# EAGLE board SHEALD 2022 (EAGLE 9.6.2)
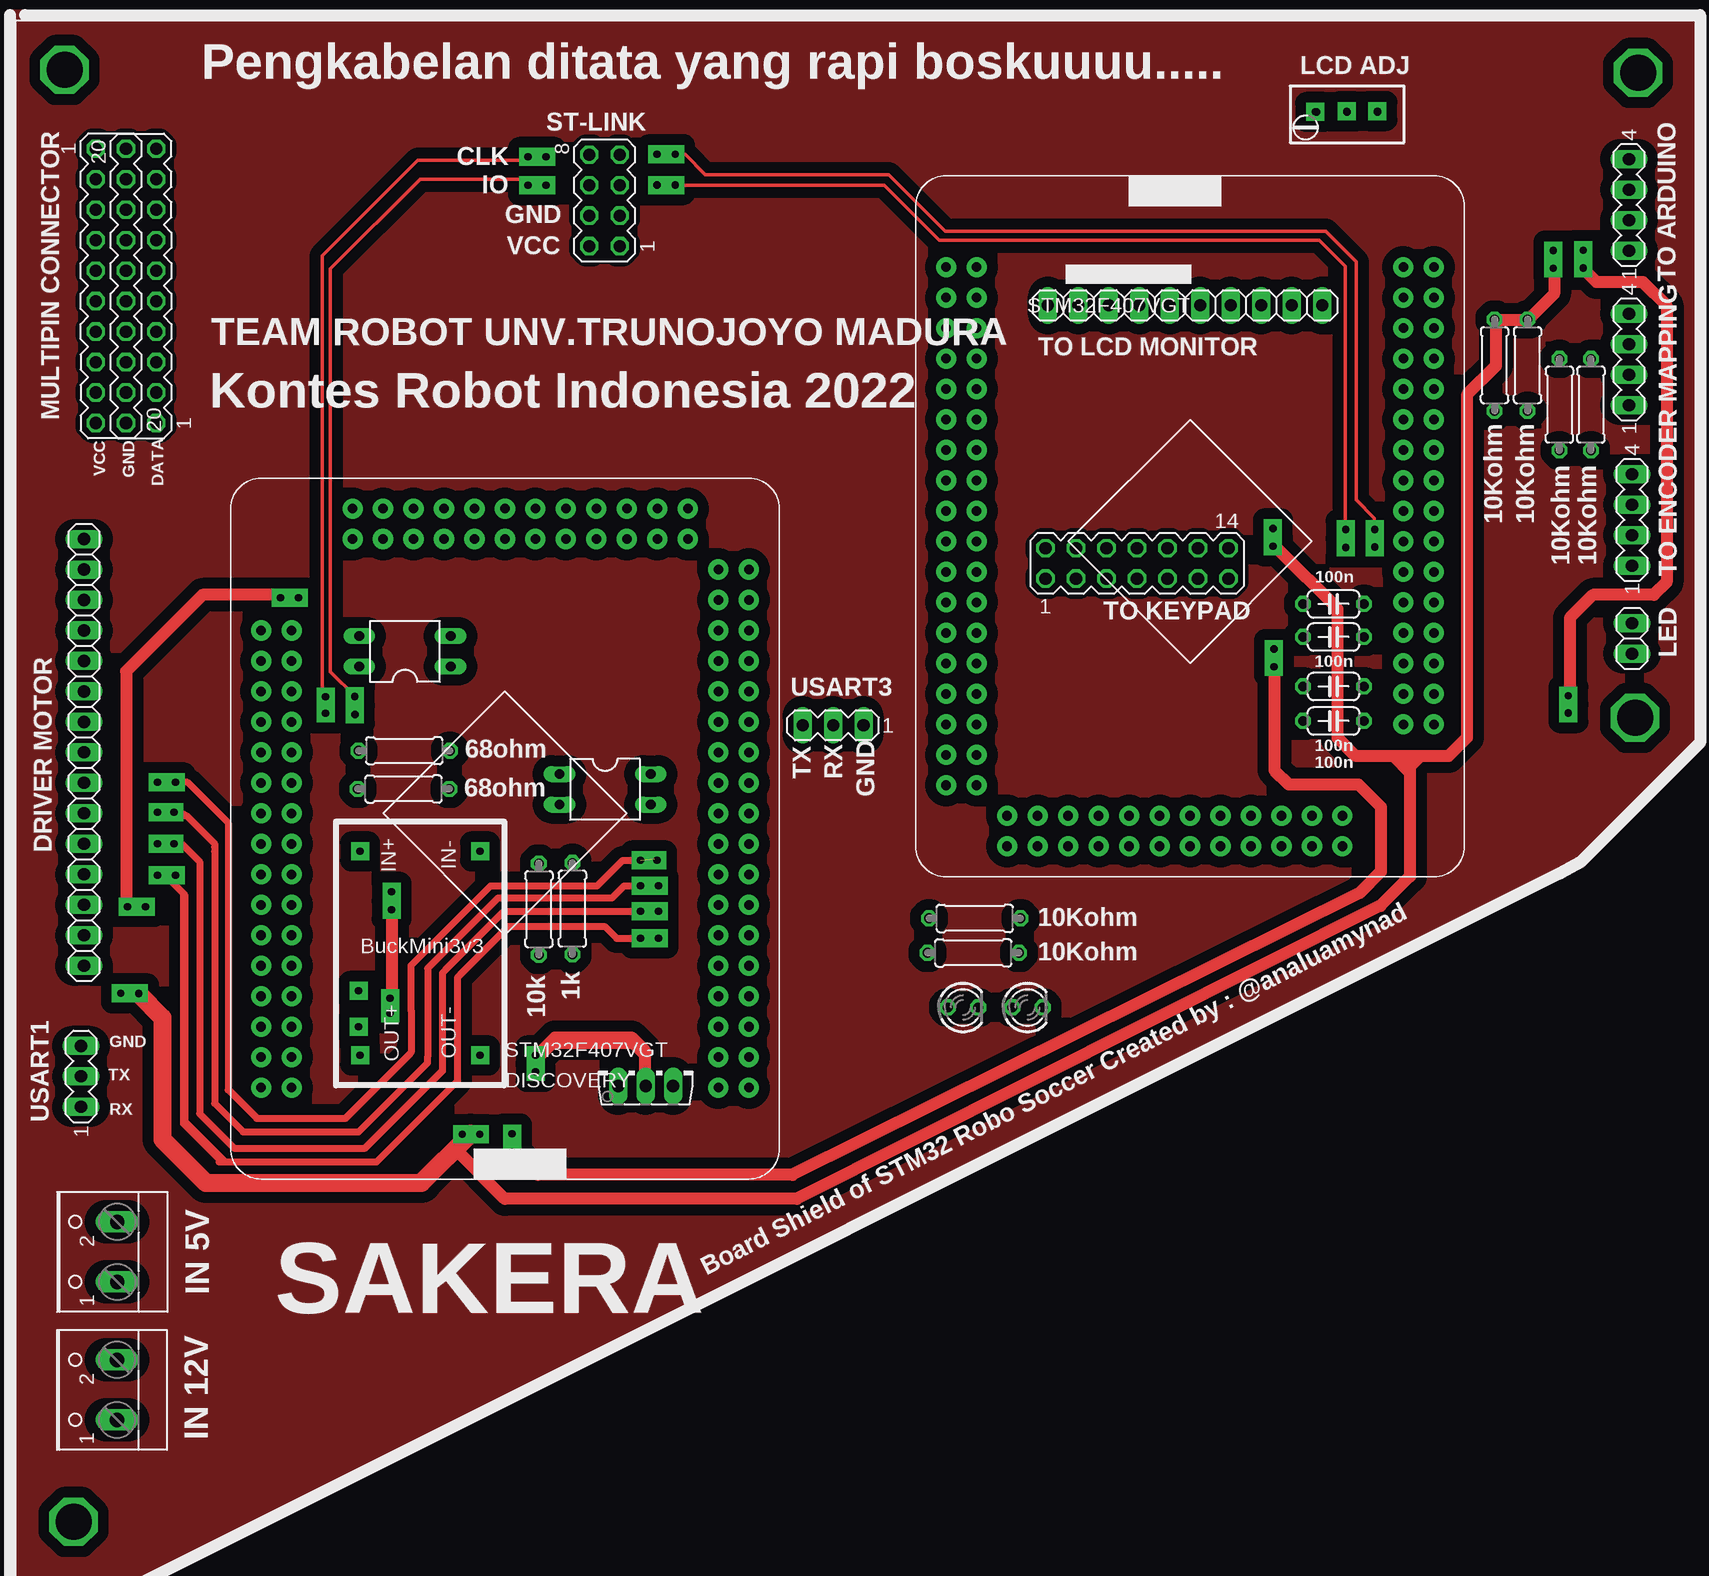
[diagram p0: board, top side]
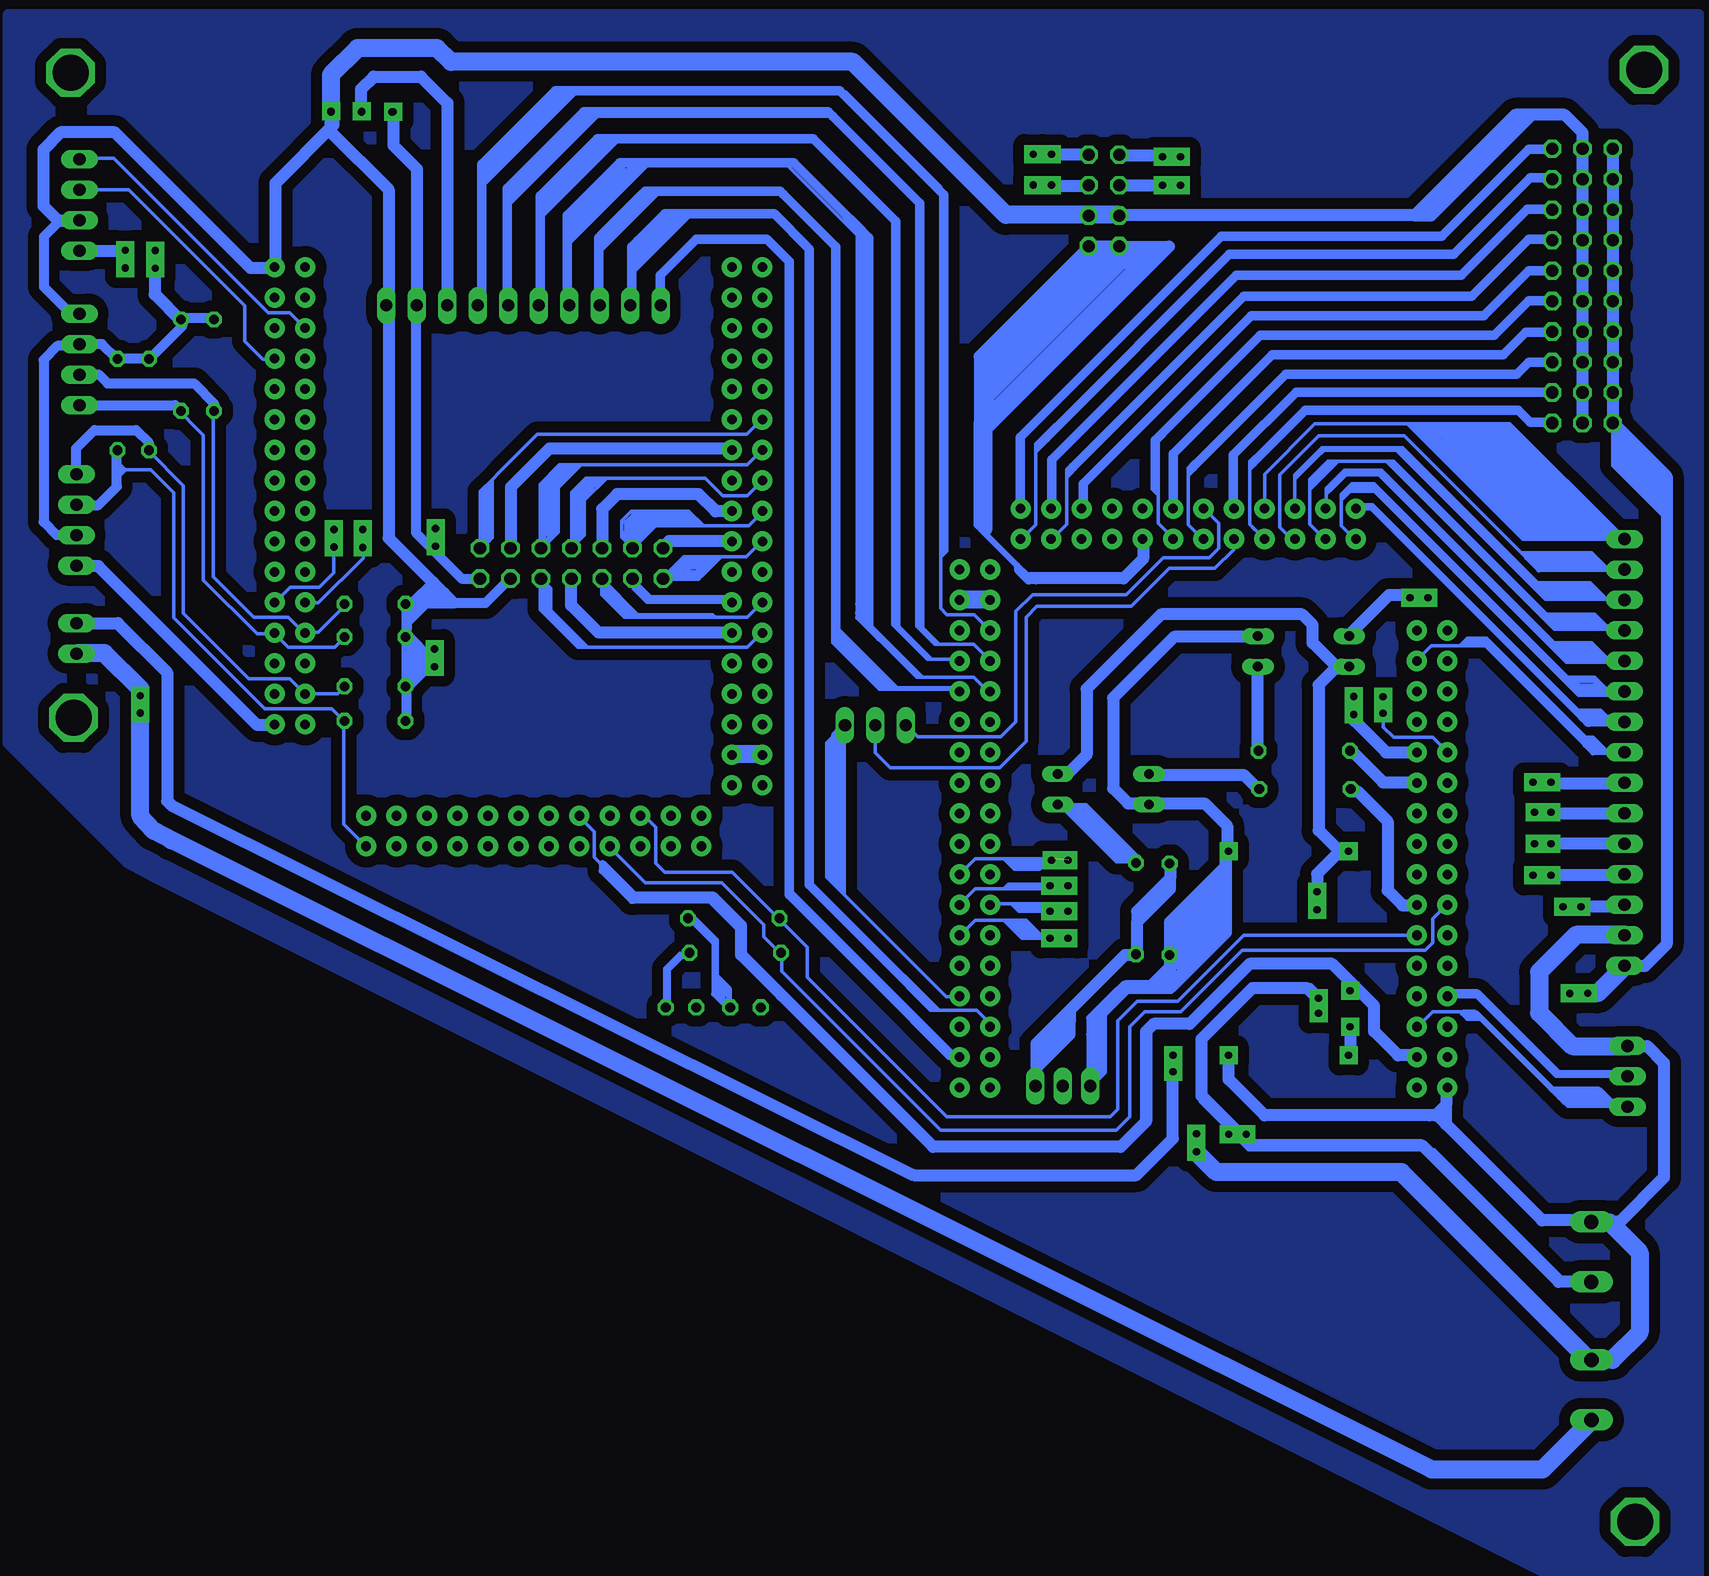
[diagram p1: board, bottom side, seen from below]

No outline drawn. Coordinates in mm, seen from the top.
Copper layers (1*16): Top 0.035mm / dielectric 1.5mm / Bottom 0.035mm
Design rules "default *": minimum track width 6mil, minimum drill 0.35mm, track to track 36mil, track to pad 36mil, pad to pad 6mil, via to via 6mil, smd to smd 6mil, copper to edge 60mil, drill to drill 60mil, minimum pad ring 10mil, minimum via ring 8mil, stop-mask expansion 0mil, vias tented up to drill 0mil, thermal gap 0mil

## Footprints (pad centres in the part's own frame; a part is rotated, then mirrored left to right if it is on the bottom)
STM32F407VGT = drill 0.8 pad 1.676: 1 22.86,12.7; 2 25.4,12.7; 3 22.86,15.24; 3.3V(0) -12.7,-25.4; 3.3V(1) 22.86,-20.32; 3.3V(3) 10.16,17.78; 4 25.4,15.24; GND -15.24,-27.94; GND(0) -15.24,-25.4; GND(1) 25.4,-20.32; GND(2) -15.24,10.16; GND(3) 12.7,17.78; PA0 25.4,-15.24; PA1 22.86,-12.7; PA2 25.4,-12.7; PA3 25.4,-10.16; PA4 22.86,-7.62; PA5 25.4,-7.62; PA6 22.86,-5.08; PA7 25.4,-5.08; PA8 -15.24,7.62; PA9 -12.7,5.08; PA10 -15.24,5.08; PA11 -12.7,2.54; PA12 -15.24,2.54; PA13 -12.7,0; PA14 -15.24,0; PA15 -12.7,-2.54; PB0 22.86,0; PB1 25.4,0; PB2 25.4,10.16; PB3 -12.7,-17.78; PB4 -15.24,-17.78; PB5 -12.7,-20.32; PB6 -15.24,-20.32; PB7 -12.7,-22.86; PB8 22.86,2.54; PB9 25.4,2.54; PB10 15.24,17.78; PB11 12.7,20.32; PB12 10.16,20.32; PB13 7.62,17.78; PB14 7.62,20.32; PB15 5.08,17.78; PC0 22.86,-17.78; PC1 25.4,-17.78; PC2 22.86,-15.24; PC3 22.86,-10.16; PC4 22.86,-2.54; PC5 25.4,-2.54; PC6 -5.08,20.32; PC7 -7.62,17.78; PC8 -7.62,20.32; PC9 -12.7,7.62; PC10 -15.24,-2.54; PC11 -12.7,-5.08; PC12 -15.24,-5.08; PC13 25.4,-22.86; PD0 -12.7,-7.62; PD1 -15.24,-7.62; PD2 -12.7,-10.16; PD3 -15.24,-10.16; PD4 -12.7,-12.7; PD5 -15.24,-12.7; PD6 -12.7,-15.24; PD7 -15.24,-15.24; PD8 5.08,20.32; PD9 2.54,17.78; PD10 2.54,20.32; PD11 0,17.78; PD12 0,20.32; PD13 -2.54,17.78; PD14 -2.54,20.32; PD15 -5.08,17.78; PE0 -15.24,-22.86; PE1 22.86,5.08; PE2 22.86,-27.94; PE3 25.4,-27.94; PE4 22.86,-25.4; PE5 25.4,-25.4; PE6 22.86,-22.86; PE7 25.4,5.08; PE8 22.86,7.62; PE9 25.4,7.62; PE10 22.86,10.16; PE11 20.32,20.32; PE12 20.32,17.78; PE13 17.78,20.32; PE14 17.78,17.78; PE15 15.24,20.32; VCC -12.7,-27.94; VCC(2) -12.7,10.16
1X15 = drill 1.016 long: 1 -17.78,0; 2 -15.24,0; 3 -12.7,0; 4 -10.16,0; 5 -7.62,0; 6 -5.08,0; 7 -2.54,0; 8 0,0; 9 2.54,0; 10 5.08,0; 11 7.62,0; 12 10.16,0; 13 12.7,0; 14 15.24,0; 15 17.78,0
DIL04 = drill 0.813 long: 1 -1.27,-3.81; 2 1.27,-3.81; 3 1.27,3.81; 4 -1.27,3.81
0207/7 = drill 0.813 octagon: 1 -3.81,0; 2 3.81,0
MA07-2 = drill 1.016 octagon: 1 -7.62,-1.27; 2 -7.62,1.27; 3 -5.08,-1.27; 4 -5.08,1.27; 5 -2.54,-1.27; 6 -2.54,1.27; 7 0,-1.27; 8 0,1.27; 9 2.54,-1.27; 10 2.54,1.27; 11 5.08,-1.27; 12 5.08,1.27; 13 7.62,-1.27; 14 7.62,1.27
1X10 = drill 1.016 long: 1 -11.43,0; 2 -8.89,0; 3 -6.35,0; 4 -3.81,0; 5 -1.27,0; 6 1.27,0; 7 3.81,0; 8 6.35,0; 9 8.89,0; 10 11.43,0
MA10-2 = drill 1.016 octagon: 1 -11.43,-1.27; 2 -11.43,1.27; 3 -8.89,-1.27; 4 -8.89,1.27; 5 -6.35,-1.27; 6 -6.35,1.27; 7 -3.81,-1.27; 8 -3.81,1.27; 9 -1.27,-1.27; 10 -1.27,1.27; 11 1.27,-1.27; 12 1.27,1.27; 13 3.81,-1.27; 14 3.81,1.27; 15 6.35,-1.27; 16 6.35,1.27; 17 8.89,-1.27; 18 8.89,1.27; 19 11.43,-1.27; 20 11.43,1.27
MA04-1 = drill 1.016 long: 1 -3.81,0; 2 -1.27,0; 3 1.27,0; 4 3.81,0
MA03-1 = drill 1.016 long: 1 -2.54,0; 2 0,0; 3 2.54,0
W237-102 = drill 1.194 long: 1 -2.5,-1.27; 2 2.5,-1.27
TO126AV = drill 1.016 long: B 2.286,-1.27; C 0,-1.27; E -2.286,-1.27
C050-024X044 = drill 0.813 octagon: 1 -2.54,0; 2 2.54,0
LED3MM = drill 0.813 octagon: A -1.27,0; K 1.27,0
BUCK3V3 = drill 0.6 pad 1.5 square: IN+ -5,10; IN- 5,10; OUT+ -5,-7; OUT- 5,-7
MA04-2 = drill 1.016 octagon: 1 -3.81,-1.27; 2 -3.81,1.27; 3 -1.27,-1.27; 4 -1.27,1.27; 5 1.27,-1.27; 6 1.27,1.27; 7 3.81,-1.27; 8 3.81,1.27
1X02 = drill 1.016 long: 1 -1.27,0; 2 1.27,0
RTRIMT93YA = drill 0.61: 1 0,-2.54; 2 0,0; 3 0,2.54

## Placement (x,y rotation side)
E$1  [STM32F407VGT]  45.75,99 0 top
E$2  [STM32F407VGT]  113,111.5 180 top
E$3  [1X15]  15.75,99 90 top
E$4  [DIL04]  59.17,95.92 270 top
E$5  [0207/7]  42.38,95.95 0 top
E$6  [MA07-2]  103.5,114.75 0 top
E$7  [1X10]  107.5,136.25 0 top
E$8  [MA10-2]  18,137.88 270 top
E$9  [MA10-2]  20.5,137.88 90 top
E$10  [MA04-1]  144.75,118.38 90 top
E$11  [MA04-1]  144.5,131.75 90 top
E$12  [MA03-1]  15.5,72 90 top
E$13  [W237-102]  17.23,45.88 90 top
E$14  [TO126AV]  62.55,72.47 0 top
E$15  [0207/7]  138.71,127.98 90 top
E$16  [0207/7]  141.33,127.98 90 top
E$17  [0207/7]  136.04,131.27 270 top
E$18  [0207/7]  133.29,131.27 270 top
E$19  [C050-024X044]  119.88,111.38 0 top
E$20  [C050-024X044]  119.88,108.62 0 top
E$21  [C050-024X044]  119.88,104.5 0 top
E$22  [C050-024X044]  119.88,101.62 0 top
E$23  [LED3MM]  94.38,77.75 0 top
E$24  [LED3MM]  89,77.75 0 top
E$25  [0207/7]  89.98,85.17 0 top
E$26  [0207/7]  89.86,82.3 0 top
E$27  [W237-102]  17.25,57.38 90 top
E$28  [MA04-1]  144.5,144.62 90 top
E$29  [BUCK3V3]  43.75,80.75 0 top
E$30  [MA04-2]  59.12,145 90 top
E$31  [1X02]  144.75,108.5 90 top
E$32  [RTRIMT93YA]  121,152.38 90 top
E$33  [MA03-1]  78.17,101.26 180 top
E$42  [DIL04]  42.49,107.42 90 top
E$43  [0207/7]  56.45,85.98 90 top
E$44  [0207/7]  42.44,99.14 180 top
E$45  [0207/7]  53.66,85.94 270 top

## Library data of the parts
E$1 E$2 E$29 = KRSBI COMPONENT
E$3 = adafruit
E$4 E$42 = ic-package
E$5 E$15-E$18 E$25 E$26 E$43-E$45 = resistor
E$6 E$8-E$12 E$28 E$30 E$33 = con-lstb
E$7 E$31 = Connector
E$13 E$27 = con-wago-500
E$14 = transistor-power
E$19-E$22 E$32 = rcl
E$23 E$24 = led

## Nets
S$15: E$3.8
S$227: E$29.OUT-

## Tracks (layer width: path | path; a pad name or v marks a point on that pad's centre or on a via)
BUTTOM
  pour Bottom: 10.31,160.44 150.43,160.44 150.43,146.99 150.43,100.8 150.43,99.8 149.31,98.69 140.53,89.9 138.34,88.7 20.66,29.85 20.19,29.61 9.6,29.61 9.6,31.21 9.6,160.44 9.64,160.44 10.62,160.43
S$1
  Bottom 0.3: 71,86.25 71.25,86.25
S$2
  Bottom 0.3: 50.79,119.35 49.55,118.11 49.55,116.01 50.34,115.22 54.19,115.22 57.26,112.15 65.06,112.15 66.46,110.75 66.46,101.56 67.74,100.29 74.64,100.29 75.54,101.19
S$3
  Bottom 0.3: 48.33,116.8 48.33,115.89 49.89,114.33 53.69,114.33 56.84,111.17 64.71,111.17 65.61,110.28 65.61,99.91 67.83,97.7 76.94,97.7 78.2,98.96 78.2,101.12
S$4
  Bottom 0.3: 71.19,78.64 72.28,78.64 80.76,87.12 80.76,101.28
S$5
  Bottom 0.3: 33,76.12 31.75,77.38 28.38,77.38 28.25,77.25 20.5,69.5 15.62,69.5
  Bottom 0.5: 15.62,69.5 15.75,69.62 16.62,69.62 17.88,70.88 21.75,70.88 | 21.75,70.88 21.88,71 | 21.75,70.88 20.75,69.88 17.38,69.88 | 17.38,69.88 17.12,69.62 | 17.38,69.88 18,70.5 20.75,70.5 | 20.88,70.62 20.75,70.5 | 20.75,70.5 20.75,70.38 20.62,70.25 | 20.62,70.25 18.12,70.25 | 20.62,70.25 21.12,70.25 27.75,76.88 | 27.75,76.88 28.12,77.25 | 28.12,77.25 28.25,77.25 | 28.12,77.25 28.18,77.3 29.25,77.3 28.82,76.88 27.75,76.88
S$6
  Bottom 0.3: 80.83,101.17 82.21,99.79 82.21,88.59 79.81,86.19
S$7  (via drill 0.6 pad 1.5)
  Top 0.3: 24.25,93.88 26.62,91.5 26.62,91.12 | 26.62,90.75 26.62,69.88 29.25,67.25 38.62,67.25 44.38,73 44.38,73.62 44.38,81.12 50.12,86.88 58.25,86.88
  Top 0.6: 24.25,93.75 26.62,91.38 26.62,91.12 26.62,90.75 26.62,69.75 29,67.38 38.62,67.38 44.38,73.12 44.38,73.62 44.38,81 50.25,86.88 59.75,86.88 60.75,87.88 v62.12,87.88
S$8
  Bottom 0.3: 40.62,119.38 40.62,120.5 | 40.62,120.5 40.62,121 39.62,122 39.5,122.12 | 39.5,122.12 39,122.12 | 39,122.12 36.25,122.12 22.25,108.12 | 16.88,106.5 20.62,106.5 22.25,108.12 | 16.88,106.5 15.5,106.5 | 16.88,106.5 18.5,108.12 21.62,108.12 | 21.62,108.12 22.25,108.12 | 40.62,120.5 39,122.12 | 21.62,108.12 36,122.5 39.12,122.5 39.5,122.12
S$9
  Bottom 0.3: 43.25,116.5 44.5,117.75 44.5,122.12 41.25,125.38 34.12,125.38 23,114.25 17.12,114.25 | 17.12,114.25 16,114.25 15.75,114.25 | 17.12,114.25 18.5,115.62 24.25,115.62
  Bottom 0.5: 16,114.25 22.88,114.25 23.88,115.25 23.75,115.38 18.62,115.38 17.88,114.62 | 17.75,114.5 17.88,114.62 | 17.88,114.62 22.88,114.62 23.25,115 18.62,115 18.75,115.12 23.62,115.12
S$10
  Bottom 0.3: 40.75,116.75 42,118 42,120.88 | 42,120.88 42,121.75 40.5,123.25 39.62,123.25 | 39.62,123.25 36.12,123.25 35.62,123.25 | 35.62,123.25 22.88,110.5 | 22.88,110.5 21.62,109.25 15.75,109.25 | 16.88,109.12 18.25,110.5 22.25,110.5 | 22.25,110.5 22.88,110.5 | 42,120.88 39.62,123.25 | 22.25,110.5 35,123.25 35.62,123.25
S$11
  Bottom 0.3: 45.75,119.25 45.75,122.19 41.56,126.38 33.88,126.38 24.25,116.75 15.75,116.75
S$12
  Bottom 0.5: 45.75,119.5 45.75,119
S$13
  Bottom 0.3: 43.25,119.25 43.25,121.75 | 43.25,121.75 43.25,122.12 41,124.38 40.62,124.38 | 40.62,124.38 35.75,124.38 35,124.38 | 35,124.38 23.75,113.12 | 23.75,113.12 22.38,111.75 15.75,111.75 | 17.12,111.62 18.62,113.12 23,113.12 | 23,113.12 23.75,113.12 | 43.25,121.75 40.62,124.38 | 23,113.12 34.25,124.38 35,124.38
  Bottom 0.5: 43.25,119.25 43.25,119.5
S$14
  Bottom 0.3: 33.12,73.62 35,73.62 36.75,75.38 36.75,77.88 40.38,81.5 46.5,81.5 51.38,76.62 55.12,76.62 56,75.75 56,68.25 57.75,66.5 73.75,66.5 86,78.75 89.12,81.88 89.12,83 89.12,84.75 91.5,87.12 92.25,87.12 98.5,87.12 101.62,90.25 101.62,92.38 102.88,93.62 102.88,93.75
  Bottom 0.5: 89.12,83 89.12,84.62 91.62,87.12 92.25,87.12 98.25,87.12 100.88,89.75 101,89.75 101,89.12 98.5,86.62
  Bottom 1: 32.88,73.62 33,73.75 34.62,73.75 36.62,75.75 36.62,77.88 40.12,81.38 47,81.38 52,76.38 55,76.38 55.62,75.75 55.62,68.25 57.75,66.12 73.38,66.12 86,78.75 89.38,82.12 89.38,84.38 91.88,86.88 98.38,86.88 98.5,87
S$15
  Bottom 0.3: 33.25,106.5 31.88,107.88 29.5,107.88 | 29.5,107.88 27.38,107.88 19.75,100.25 | 19.75,100.25 18.5,99 17.12,99 | 17.12,99 E$3.8 | 17.12,99 18.38,100.25 19,100.25 | 19,100.25 19.75,100.25 | 19,100.25 27.25,108.5 28.88,108.5 29.5,107.88
  Bottom 0.5: E$3.8 18.38,99 19,99.62
S$16
  Bottom 0.3: 71.12,86.38 69.88,87.62 68.12,87.62 67.5,87.62 | 67.5,87.62 64.25,87.62 | 64.25,87.62 64,87.62 63.75,87.88 | 64.25,87.62 63.88,88 67.12,88 67.5,87.62
S$17  (via drill 0.6 pad 1.5)  (1 unrouted)
  Top 0.3: 24.5,96.5 27.88,93.12 27.88,71 30.5,68.38 37.62,68.38 43,73.75 43,77.5 43,81.38 49.25,87.62 49.38,87.62
  Top 0.6: v62.12,90 60.62,90 58.5,87.88 49.62,87.88 49.38,87.62 43,81.25 43,77.5 43,74 37.5,68.5 30.12,68.5 27.75,70.88 27.75,93.12 24.38,96.5 23.38,96.5
  Bottom 0.3: 71.25,88.75 69.88,90.12 67.5,90.12 | 63.25,90.12 63.62,90.12 | 63.62,90.12 67.5,90.12 | 63.62,90.12 64.5,89.25 66.62,89.25 67.5,90.12
S$18
  Top 0.3: 25.38,68.9 28.4,65.88 39.25,65.88 45.75,72.38 45.75,81 50.5,85.75 58.12,85.75
  Top 0.6: 23.88,91.38 25.38,89.88 25.38,68.9 28.27,66 39.12,66 45.62,72.5 45.62,80.62 50.75,85.75 62.38,85.75
S$19
  Top 0.3: 22.5,88.88 23.88,87.5 23.88,68 27,64.88 27.12,64.75 40.12,64.75 47,71.62 47,80.62 51,84.62 57.88,84.62
  Top 0.6: 22.38,88.88 24.12,87.12 24.12,68.26 27.51,64.88 | 27,64.88 27.51,64.88 | 27.51,64.88 40.12,64.88 46.88,71.62 46.88,80.25 51.12,84.5 59.12,84.5 60.12,83.5 62.38,83.5
S$20
  Bottom 0.3: 68.61,109.15 69.92,110.46 72.21,110.46 72.75,111 72.75,115.25 | 72.75,115.25 72.75,146.12 80.62,154 105.12,154 111.25,147.88 111.25,136.25 111,136.25 | 72.25,118 72.25,115.75 72.5,115.5 | 72.75,115.25 72.5,115.5 | 72.5,115.5 72.5,117.88
  Bottom 0.5: 101.38,154.12 103.12,154.12 110.62,146.62 | 111.12,146.12 110.62,146.62 | 110.62,146.62 110.62,147.62 104.62,153.62 104.62,153.75 104,153.75 103.88,153.62 104,153.5 104.38,153.5 107,150.88 107,150.62 110.38,147.25 110.5,147.25
  Bottom 0.8: 111,135.88 111,148 104.88,154.12 101.38,154.12 81.15,154.12 72.5,145.47 72.5,117.88 72.5,117.75
S$21
  Bottom 0.3: 87.6,116.64 88.92,115.31 90.59,115.31 91.01,115.31 | 91.01,115.31 92.66,113.66 92.67,113.66 92.9,113.44 95.72,113.44 | 95.72,113.44 95.83,113.44 | 95.72,113.44 95.72,113.72 94.14,115.31 91.01,115.31
S$22
  Bottom 0.3: 76.5,111.25 76.5,109.38 | 76.75,111.5 76.75,109.62 76.5,109.38 | 76.5,109.38 73.88,106.75 73.5,106.75 | 71.25,106.75 73.5,106.75 | 73.5,106.75 76.25,109.5 76.25,111.12
  Bottom 0.5: 98.5,150.12 99.62,150.12 106.12,143.62 | 106.12,143.62 106.12,142.75 | 106.12,143.62 106.12,144.62 101,149.75 100.5,149.75 105.62,144.62 105.62,144.38
  Bottom 0.8: 106.12,136.25 106.12,142.75 106.12,145.38 101.38,150.12 98.5,150.12 83.36,150.12 76.5,143.26 76.5,111.25
S$23
  Bottom 0.8: 21.88,149.25 23.75,149.25 31,142 49.38,142 66.12,125.25 66.12,119.25
S$24
  Bottom 1: 80.38,143.38 79.38,142.38 79.38,110.62 78.88,110.12
S$25
  Bottom 0.3: 125.66,111.45 124.59,111.45 120.86,115.17 120.86,116.14
S$26
  Bottom 1: 90.19,116.6 95.36,116.6 95.88,116.09
S$27
  Bottom 0.8: 85.38,137.75 85.38,87.12 74.25,76
S$28
  Bottom 0.3: 128.25,111.45 126.95,112.75 124.51,112.75 123.31,113.95 123.31,116.06
S$29
  Bottom 0.3: 100.91,113.41 97.99,110.49 91.71,110.49 91.47,110.25 | 87.62,111.5 88.88,110.25 90.94,110.25 91.47,110.25 | 91.47,110.25 99.12,110.25 101,112.12 101,113.5
S$30
  Bottom 1: 90.16,119.08 91.49,119.08 92.92,120.51 99.7,120.51 100.95,119.26 100.95,116.06
S$31
  Bottom 0.3: 98.34,113.41 96.89,111.96 90.54,111.96 90.33,111.75 | 90.14,111.56 90.33,111.75 | 90.33,111.75 95.2,111.75 95.21,111.74 96.94,111.74 98.26,113.06 | 98.26,113.06 98.26,113.1 | 98.26,113.06 98.26,112.81 97.14,111.69 96.99,111.69 96.8,111.5 | 98.38,113.5 98.38,112.62 97.25,111.5 96.8,111.5 | 90.12,111.5 95.3,111.5 96.8,111.5
S$32  (via drill 0.6 pad 1.5)
  Bottom 1.5: 18.45,43.38 22.59,39.24 31.82,39.24 31.84,39.25 136.82,91.66 138.3,92.45 139.44,93.69 v139.44,102.28 139.44,104.29 142.43,107.28 144.61,107.28
S$33
  Bottom 0.3: 103.34,116.16 102.42,117.08 102.42,120 100.58,121.85 | 87.54,121.7 88.86,120.38 90.9,120.38 92.38,121.85 100.05,121.85 100.58,121.85 | 100.58,121.85 102.31,121.85 103.5,120.66 103.5,115.92
S$34
  Bottom 1: 90.19,124.31 105.34,124.31 108.55,121.1 108.55,116.1
S$35
  Bottom 1: 144.7,109.78 141.31,109.78 137.2,105.66 137.2,94.95 136.85,94.6 74.96,63.77 56.42,63.77 53.39,66.81 53.39,72.46
S$36  (via drill 0.6 pad 1.5)
  other vias: 140.7,140.85
S$37
  Bottom 1: 90.14,108.97 101.25,108.97 103.53,111.25 103.53,113.46
S$38  (via drill 0.6 pad 1.5)
  other vias: 140.7,139.36
S$39
  Bottom 0.3: 122.38,111.25 124.62,109 125.62,109 125.62,108.88
S$40
  Bottom 0.3: 122.5,108.5 123.25,107.75 127.12,107.75 128.25,108.88 128.25,109
S$41  (via drill 3 pad 4)
  other vias: 14.12,155.88
S$42
  Bottom 0.813: 133.25,135.19 135.94,135.19 135.95,135.18 135.95,134.51 138.65,131.81 141.32,131.81 141.38,131.76 142.64,133.03 144.55,133.03
S$43
  Bottom 0.3: 138.75,124.12 135.86,121.24 135.86,110.58 130.41,105.12 127,105.12 125.75,103.88 123,103.88 122.38,104.5
S$44
  Bottom 0.3: 133.38,127.5 133.38,113.62 130,110.25 127.12,110.25 125.75,108.88
S$45
  Bottom 0.3: 128.38,108.88 129.69,108.88 134.18,113.36 134.18,125.42 136.62,127.88
S$46
  Bottom 0.813: 144.6,132.88 146.34,132.88 147.5,131.71 147.5,118.2 146.43,117.12 144.71,117.12
S$47
  Bottom 0.3: 120.62,91.12 122.5,93 122.5,101.62 123.5,102.62 129.05,102.62 136.65,110.22 136.65,120.64 138.56,122.55 140.53,122.55 140.65,122.55 | 140.68,122.55 141.43,122.55 | 141.18,123.05 140.68,122.55 | 140.68,122.55 140.65,122.55 | 140.65,122.55 141.22,121.97
S$48
  Bottom 0.813: 144.79,119.61 142.93,119.61 141.39,121.15 141.39,124.04 141.21,124.21
S$49
  Bottom 0.813: 116.51,136.31 116.47,136.28 116.47,117.31 112.65,113.49 111.21,113.49
S$50
  Bottom 1: 60.51,148.79 62.88,148.79
S$51  (via drill 3 pad 4)
  other vias: 14.88,34.88
S$52  (via drill 3 pad 4)
  other vias: 145,101.88
S$53  (via drill 3 pad 4)
  other vias: 145.25,155.62
S$54
  Bottom 0.3: 38.25,116.75 39.38,117.88 39.38,119.88 39.38,120 | 39.38,120 39.38,120.5 39.12,120.75 | 39.12,120.75 38.88,121 | 21.12,105.25 36.88,121 38.88,121 | 21.12,105.25 19.62,103.75 16.75,103.75 | 16.75,103.75 15.5,103.75 | 16.75,103.75 18.25,105.25 20.5,105.25 | 20.5,105.25 21.12,105.25 | 20.5,105.25 36.62,121.38 38.5,121.38 38.88,121 | 39.12,120.75 38.62,120.75 | 38.62,120.75 36.25,120.75 35.5,120 | 38.62,120.75 39.38,120 | 39.38,120 39.38,120.25 39,120.62
S$55
  Bottom 0.3: 38.62,73.75 38.62,73.88 | 38.62,76.12 38.62,76.25
  Bottom 1: 38.62,76.12 38.62,73.88
S$56
  Bottom 0.3: 64.12,85.88 64.38,86.12 66.25,86.12 66.38,86.25 66.38,86.12 66.12,85.88 64.25,85.88
S$57  (via drill 0.6 pad 1.5)
  other vias: 21.88,88.75
S$58  (via drill 0.6 pad 1.5)
  other vias: 23.38,88.75
S$59  (via drill 0.6 pad 1.5)
  other vias: 63.5,90
S$60
  Bottom 0.3: 64.12,87.88 64.25,87.75 67.12,87.75
S$61
  Bottom 0.3: 71.12,83.75 69.88,85 67.5,85 | 67.5,85 67.12,85 | 67.12,85 65.62,83.5 | 65.62,83.5 63.88,83.5 | 64,83.38 63.88,83.5 | 63.88,83.5 63.5,83.5 | 65.62,83.5 66,83.5 67.5,85 | 67.12,85 66.75,85 | 66.75,85 65.5,83.75 64.12,83.75 63.75,83.38 | 66.75,85 65.62,85 65.5,84.88 | 64.25,83.62 65.5,84.88 | 65.5,84.88 66.25,84.88 66.25,84.75 65.38,83.88 64.88,83.88 65.75,84.75 65.88,84.75 65.5,84.38 65.5,84.25 65.38,84.12 65.25,84.12
S$62
  Bottom 0.3: 63.88,90 67,90 | 67.12,90 67,90 | 67,90 66.5,89.5 64.38,89.5 64.12,89.75 66.62,89.75
S$63  (via drill 0.6 pad 1.5)
  other vias: 63.62,87.88
S$64  (via drill 0.6 pad 1.5)
  other vias: 62.12,85.75
S$65  (via drill 0.6 pad 1.5)
  other vias: 63.62,85.75
S$66  (via drill 0.6 pad 1.5)
  other vias: 62.12,83.5
S$67  (via drill 0.6 pad 1.5)
  other vias: 63.62,83.5
S$68
  Bottom 0.3: 66.88,86.38 66.25,85.75 63.75,85.75 64.38,86.38 66.88,86.38 | 66.88,86.38 68.38,86.38
S$69
  Bottom 1: 38.5,99.12 35.88,96.5 32.88,96.5
S$70
  Bottom 0.3: 38.75,106.25 39.75,106.25 40.88,105.12 40.88,105 40.88,92 39.62,90.75 39.5,90.75 | 39.5,90.75 38.88,90.75 | 39.5,90.75 41.25,89 | 41.38,88.88 41.38,87.62
  Bottom 1: 38.75,90.88 39.38,90.88 41.25,89 41.38,88.88 41.38,87.12 | 38.75,106.25 39.62,106.25 40.88,105 41.25,104.62 41.25,92.5 39.62,90.88
S$71
  Bottom 0.3: 46.38,106.12 46.38,99.25 46.25,99.12
  Bottom 1: 46.38,106.12 46.38,99.12
S$72
  Bottom 0.3: 38.38,99 35.88,96.5 33.12,96.5
S$73
  Bottom 0.3: 33.12,86.25 34.12,86.25 35.38,87.5 35.38,93.62 37.62,95.88 38.62,95.88
S$74
  Bottom 0.3: 46.25,96 47.38,97.12 55.38,97.12
  Bottom 1: 55.38,97.12 47.5,97.12 46.25,95.88
S$75
  Bottom 0.3: 48.62,90.75 48.62,92.88 50.38,94.62 57.25,94.62 58.62,96 58.62,103.76 53.76,108.62 46.38,108.62
S$76
  Bottom 0.3: 39.75,106.12 41.62,108 41.62,109.25 42.88,110.5 54.25,110.5 60.5,104.25 60.5,98.62 62,97.12 63,97.12
S$77
  Bottom 0.3: 93.62,82.25 93.75,82.25 94.5,82.25 95.75,81 95.75,77.75 95.75,77.62
  Bottom 0.5: 93.75,82.25 94,82 94.38,82 95.5,80.88 95.5,78 95.75,77.75
S$78
  Bottom 0.3: 63,94.62 60.62,94.62 56.25,90.25
S$79
  Bottom 0.3: 63,94.75 58.12,89.88 56.25,89.88 60.75,94.38 62.38,94.38 58.12,90.12 56.62,90.12 56.75,90.25 | 56.75,90.25 60.62,94.12 62,94.12 58.12,90.25 57.12,90.25 | 56.75,90.25 57.12,90.25 | 57.12,90.25 60.75,93.88 61.5,93.88 60.5,92.88 60.25,92.88 57.75,90.38 57.38,90.38 60.75,93.75 61.12,93.75 60,92.62 60,92.5 60.12,92.5 | 60.12,92.5 60.38,92.75 | 60.12,92.5 58.12,90.5 58,90.5
S$80
  Bottom 1: 121.03,152.36 121.03,154.29 120,155.31 116.06,155.31 113.85,153.1 113.85,135.94
S$81
  Bottom 0.3: 13.62,81.25 13.75,81.25 12.38,82.62 12.38,118.5 16.75,122.88 16.75,126.5 16.75,126.62
  Bottom 1: 16.75,126.5 12.25,122 12.25,119.25 | 12.25,119.25 12.25,83 14.04,81.21 15.97,81.21 | 12.25,119.25 16.25,123.25 16.25,125.25 12.62,121.62 12.62,120.75 15.75,123.88 15.75,124
S$82
  Bottom 0.3: 125.75,134.38 127,135.62 128.79,135.62 141.66,148.5 144.5,148.5
S$83
  Bottom 0.3: 18.5,54.88 20.62,54.88 31.62,65.88 47.12,65.88 51.12,69.88 51.12,74.5 46,79.62 41.88,79.62 41.38,79.12
S$84
  Bottom 0.3: 128.25,131.75 129.25,131.75 130.75,133.25 130.75,136.24 140.39,145.88 144.62,145.88
S$85
  Bottom 0.3: 45.75,116.75 47,118
S$86
  Bottom 0.8: 21.88,129 43.12,129 48.34,123.79 48.34,119.29
S$87
  Bottom 1: 18.38,54.88 21.25,54.88 32.62,66.25 46.88,66.25 51,70.38 51,75.12 46.75,79.38 42.25,79.38 41.38,78.5 41.38,77.5
S$88  (via drill 0.6 pad 1.5)
  other vias: 41.25,78.5
S$89
  Bottom 1: 144.62,140.81 140.64,140.81
S$90
  Bottom 1: 15.29,74.53 13.88,74.53 12.46,73.11 12.46,63.59 16.15,59.9 18.74,59.9 18.76,59.88
  Bottom 1.5: 15.6,83.8 19.77,83.8 22.88,80.7 22.88,77.3 20.1,74.53 15.29,74.53
S$91  (via drill 0.6 pad 1.5)
  other vias: 53.38,72.38
S$92  (via drill 0.6 pad 1.5)
  other vias: 53.38,73.75
S$93
  Bottom 0.3: 68.62,111.75 71.14,111.75 71.25,111.75 71.38,111.62
  Bottom 1.5: 68.59,111.74 71.12,111.74 71.14,111.75
S$94
  Bottom 0.3: 87.62,98.75 90.25,98.75
S$95
  Bottom 0.8: 21.75,136.62 23.75,136.62 26.62,133.75 46.12,133.75 54.86,125.01 54.86,121.62
S$96
  Bottom 0.8: 21.75,134 24,134 25.88,132.12 45.12,132.12 53.38,123.88 53.38,119.25
S$97
  Bottom 1: 55.88,116.75 55.88,115.12 57.5,113.5 65.38,113.5
S$98
  Bottom 0.8: 21.75,131.5 23.75,131.5 24.75,130.5 44,130.5 51.75,122.75
S$99
  Bottom 0.8: 46.75,123.12 42.38,127.5 24.62,127.5 23.62,126.5 21.88,126.5
S$100
  Bottom 0.5: 40.12,123 40.25,123 41.88,121.38 41.88,121.25
S$101
  Bottom 0.5: 16,116.88 16.38,116.88
S$102
  Bottom 0.3: 63.49,116.78 62.25,118.01 62.25,121.9 | 62.25,122.26 62.25,122.6 61.25,123.6 61.19,123.54 61.19,122.96 62.25,121.9 | 62.25,121.9 62.25,122.26 | 62.25,122.26 61.79,122.72 61.67,122.72
S$103
  Bottom 0.3: 30.5,99 31.75,100.25 35,100.25 35.86,101.11 35.86,102.26
S$104
  Bottom 0.3: 38.25,101.62 38.25,101.75
  Bottom 1: 38.25,101.62 35.62,99 33.12,99
S$105  (via drill 0.6 pad 1.5)
  other vias: 38.33,102.16
S$106  (via drill 0.6 pad 1.5)
  other vias: 38.31,103.66
S$107  (via drill 0.6 pad 1.5)
  other vias: 35.88,102.25
S$108  (via drill 0.6 pad 1.5)
  Top 0.3: v35.88,103.62 35.59,103.62 35.59,140.38 43.56,148.35 52.75,148.35
S$109
  Top 0.3: 38.38,103.25 38.38,103.62 36.29,105.71 36.29,139.29 43.75,146.75 52.49,146.75
S$110  (via drill 0.6 pad 1.5)
  other vias: 52.75,146.25
S$111  (via drill 0.6 pad 1.5)
  other vias: 54.25,146.25
S$112  (via drill 0.6 pad 1.5)
  other vias: 52.75,148.62
S$113  (via drill 0.6 pad 1.5)
  other vias: 54.25,148.62
S$114
  Bottom 0.3: 54.25,148.5 54.5,148.75 57.75,148.75
S$115
  Bottom 0.3: 57.75,146.25 54.38,146.25 54.25,146.38
S$116
  Bottom 1: 128.2,101.28 129.68,101.28 142.93,114.53 144.71,114.53
S$117
  Bottom 0.813: 123.49,152.34 123.49,151.44 123.55,151.5 123.55,152.3
S$118
  Top 1: 62.5,71.12 62.5,73.75 | 62.5,73.75 61.5,74.75 54.75,74.75 53.38,73.38 53.38,73.62 55,75.25 61.38,75.25 62.5,74.12 62.5,73.75
S$119
  Bottom 0.3: 33,83.75 47.5,83.75 53,78.25 56.38,78.25 58,76.62 58,69.25 58.62,68.62 72.22,68.62 83.88,80.28 83.88,82.75 90.12,89 95.75,89 96.5,89.75 96.5,92.75 97.5,93.75 97.75,93.75
S$120
  Bottom 0.3: 86.12,82.25 87.5,83.62 87.5,84.62 91,88.12 91.88,88.12 92,88.12 97.38,88.12 100.38,91.12
S$121
  Bottom 0.3: 30.5,86.38 31.75,85.12 31.75,83.12 32.38,82.5 47.62,82.5 52.75,77.38 55.75,77.38 57,76.12 57,68.62 58.12,67.5 72.75,67.5 86,80.75 86,82.25
S$122
  Bottom 0.3: 19.25,149.38 19.25,150.75 20.62,152.12 20.75,152.12 | 24.88,152.12 25,152.12 33.5,143.62 58,143.62
  Bottom 1: 19.25,126.25 19.25,149.38 19.25,150.62 20.75,152.12 23.5,152.12 | 23.5,152.12 24.88,152.12 33.25,143.75 | 33.25,143.75 60.38,143.75 | 33.25,143.75 31.88,143.75 23.5,152.12
S$123  (via drill 0.6 pad 1.5)
  other vias: 41.25,77.25
S$124
  Top 0.3: 41.25,78.62 41.38,78.75 41.38,85.12
S$125  (via drill 0.6 pad 1.5)
  other vias: 41.38,85.88
S$126  (via drill 0.6 pad 1.5)
  other vias: 41.38,87.38
S$127
  Bottom 0.3: 93.88,85.12 93.12,85.12 91.38,83.38 91.38,80.25 91.38,79 90.12,77.75
  Bottom 0.5: 93.75,85.25 91.62,83.12 91.62,78.88 90.38,77.62 90.38,79.25 91.38,80.25 91.38,79.38 90.88,78.88 | 90.88,78.88 90.88,78.75 | 90.88,78.88 90.88,79.38 91,79.5 91.12,79.5
S$130  (via drill 0.6 pad 1.5)
  other vias: 38.62,76.12
S$131  (via drill 0.6 pad 1.5)
  other vias: 38.62,79.12
S$132
  Bottom 0.3: 145.38,133 144.62,133 144.5,133.12
S$133
  Bottom 0.3: 106.06,115.86 104.59,117.34 104.59,121.05 102.69,122.95 | 87.59,124.2 88.84,122.95 101.89,122.95 102.69,122.95 | 102.69,122.95 104.51,122.95 106.1,121.36 106.1,116.04
S$134
  Bottom 0.813: 144.3,130.53 144.51,130.53 144.54,130.5 142.91,130.5 142.16,129.75 134.95,129.75 133.28,128.07 133.28,127.35
S$135
  Bottom 0.8: 21.75,146.88 23.62,146.88 30,140.5 48.67,140.5 64,125.17
S$136
  Bottom 0.3: 66,116.75 64.8,117.95 64.8,124.03 | 64.8,124.47 64.8,124.71 63.21,126.3 63.21,125.61 64.8,124.03 | 64.8,124.03 64.8,124.47 | 64.8,124.47 64.3,124.97 64.3,124.79 64.67,124.41 64.67,124.4
S$137
  Bottom 0.3: 63.5,119.25 63.5,119.38
  Bottom 0.8: 21.75,144.25 23.88,144.25 29.38,138.75 48.12,138.75 63.5,123.38 63.5,119.38
S$138
  Bottom 0.8: 21.75,141.75 23.75,141.75 28.5,137 47.5,137 61.75,122.75
S$139
  Bottom 0.3: 51.35,123.12 51.6,122.88 51.6,122.55 52.11,122.04 | 50.85,116.7 52.11,117.96 52.11,121.14 52.11,122.04 | 52.11,122.04 52.11,122.74 51.65,123.2
S$140
  Bottom 0.8: 21.75,139.12 23.75,139.12 27.5,135.38 46.88,135.38 60.88,121.38 60.88,119.12
S$141
  Bottom 0.5: 17.88,112.12 22.38,112.12 34.5,124.25 40.88,124.25 41.12,124 | 17.88,112.12 17.75,112 | 17.88,112.12 18.5,112.75 22.5,112.75 | 22.5,112.75 22.62,112.88 | 22.5,112.75 22.25,112.5 18.75,112.5 18.62,112.38
S$142
  Bottom 0.5: 17.25,109.38 17.38,109.5 17.88,109.5 17.88,109.62 18.5,110.25 18.5,109.88 18.12,109.5 21.5,109.5 22.25,110.25 | 22.38,110.38 22.25,110.25 | 22.25,110.25 18.75,110.25 18.75,110 18.88,109.88 21.88,109.88 35.12,123.12
S$143
  Bottom 0.5: 17.12,106.62 17.38,106.62 18.62,107.88 21.5,107.88 | 21.75,107.88 21.5,107.88 | 21.5,107.88 20.38,106.75 18.12,106.75 | 17.88,106.75 18.12,106.75 | 18.12,106.75 18.88,107.5 20.62,107.5 | 20.75,107.5 20.62,107.5 | 20.62,107.5 20.25,107.12 18.75,107.12 19,107.38 21.12,107.38 36,122.25 39,122.25 40.38,120.88 40.5,120.88
S$144
  Bottom 0.5: 38.5,121.12 36.62,121.12 19.62,104.12 17.38,104.12 18.25,105 20.12,105 19.62,104.5 18.12,104.5
S$145
  Bottom 0.3: 38.12,119.38 38,119.38 37,119.38 20.12,102.5 | 20.12,102.5 19.12,101.5 16.75,101.5 | 16.75,101.5 15.75,101.5 | 16.75,101.5 17.75,102.5 19.62,102.5 | 19.62,102.5 20.12,102.5 | 19.62,102.5 36.75,119.62 38.12,119.62
  Bottom 0.5: 17.12,101.62 17.38,101.62 18,102.25 19.5,102.25 | 19.62,102.25 19.5,102.25 | 19.5,102.25 19,101.75 | 19,101.75 17.88,101.75 | 19,101.75 19.12,101.75 36.75,119.38 38,119.38
S$146
  Bottom 0.3: 55.06,121.85 55.11,121.8 55.11,120.92 54.61,120.42 | 53.31,116.8 54.61,118.1 54.61,120.42 | 54.61,120.99 54.61,124.88 54.62,124.89 54.12,125.39 54.12,125.55 55.06,124.61 55.06,124.51 | 54.61,120.42 54.61,120.99 | 54.61,120.99 54.9,121.28 54.9,120.99 54.84,120.92
S$147
  Bottom 0.5: 29.12,108 29,108.12 27.38,108.12 18.5,99.25 17.75,99.25 18.12,99.62 18.62,99.62 18.88,99.88 18.38,99.88
S$148
  Bottom 1: 15.75,101.62 18.75,101.62 19.12,102
S$149
  Bottom 1: 15.75,93.88 22.12,93.88 22.25,94
S$150
  Bottom 1: 15.62,91.38 22,91.38 22.12,91.25
S$151
  Bottom 0.3: 30.5,78.62 28.12,78.62 21.5,72 15.62,72
  Bottom 0.5: 15.62,72.12 15.75,72.25 21.25,72.25 28,79 30.12,79 30.5,78.62
S$153
  Top 1: 41.38,86.12 41.38,78.62
S$154
  Bottom 1: 39.62,106 41.75,108.12 41.75,109.62 42.62,110.5 54.38,110.5 60.58,104.3 60.58,98.8 62.12,97.25 63.12,97.25
S$155
  Bottom 0.3: 48.88,90.75 48.88,90.62 48.88,83.62 53.5,79 57.12,79 | 57.12,79 58,79 60.38,76.62 60.38,75.5 | 57.12,79 58.75,77.38 | 59.12,77 58.75,77.38 | 58.75,77.38 58.75,78 57.88,78.88 57.62,78.88 58.62,77.88 58.62,77.75 59.38,77 59.38,76.75
  Bottom 0.5: 48.75,90.62 48.75,83.88 53.38,79.25 58,79.25 60.38,76.88 60.38,75.5 60.38,71.38 60.25,71.25 59.12,72.38 59.12,77 59.12,77.38 | 59.12,78 59.12,77.38 | 59.12,77.38 60.12,76.38 60.12,72.25 59.88,72 59.62,72.25 59.62,76.62
  Bottom 1: 46.25,108.62 53.29,108.62 58.38,103.54 58.38,96 57.12,94.75 50.75,94.75 48.88,92.88 48.88,90.62
S$156
  Bottom 1: 38.62,95.75 38,95.75 35.5,93.25 35.5,87.5 34.25,86.25 33,86.25
S$157
  Bottom 1: 53.62,89.88 53.62,88.5 | 53.62,88.5 56.38,85.75 56.38,84.88 | 56.38,82.25 56.38,84.88 | 56.38,84.88 53.62,87.62 53.62,88.5
S$158
  Bottom 1: 53.62,82.12 53.62,79.88 54.12,79.38 57.5,79.38 | 53.62,82.12 53.62,84.88 49,89.5 | 49,89.5 49,90.62 | 49,89.5 49,84.25 53.75,79.5 55.25,79.5 | 57.5,79.38 57.38,79.5 56.5,79.5 55.25,79.5 | 58.12,78.75 57.5,79.38 | 53.62,82.12 49.5,86.25 49.5,88 52.88,84.62 52.88,81.38 49.75,84.5 49.75,86.38 50,86.62 52.12,84.5 52.25,84.5 52.25,82.5 50.5,84.25 50.5,84.75 | 53.25,81.5 55.25,79.5
S$159  (via drill 0.6 pad 1.5)
  other vias: 33.62,111.88
S$161  (via drill 0.6 pad 1.5)
  other vias: 32.12,111.88
S$162
  Bottom 1: 38.62,108.88 35.38,112.12 33.75,112.12
S$163  (via drill 0.6 pad 1.5)
  Bottom 0.3: 20.25,96.5 v21.88,96.5
  Bottom 1: v21.88,96.5 21.75,96.38 15.5,96.38
S$164  (via drill 0.6 pad 1.5)
  other vias: 23.38,96.5
S$165  (via drill 0.6 pad 1.5)
  other vias: 21.88,94
S$167
  Bottom 1: 15.75,89 15.75,88.88 15.88,88.75 22.62,88.75 22.75,88.62
S$168  (via drill 0.6 pad 1.5)
  other vias: 23.25,94
S$169
  Top 1: 32.62,112.12 25.62,112.12 19.25,105.75 19.25,86.5 19.5,86.25
S$170  (via drill 0.6 pad 1.5)
  Top 0.3: v23.25,91.38 23.12,91.38
S$171  (via drill 0.6 pad 1.5)
  other vias: 21.88,91.38
S$174  (via drill 0.6 pad 1.5)
  Bottom 1: 15.62,86.12 v19.38,86.12 19.5,86.25
S$175
  Top 0.6: 24.12,93.75 24,93.88 23.5,93.88
S$177  (via drill 0.6 pad 1.5)
  other vias: 20.88,86.12
S$178
  Bottom 0.3: 46.6,117.61 46.99,118 46.99,122.09 46.99,122.54 | 46.99,122.54 46.99,123.25 46.59,123.65 46.45,123.51 46.45,123.08 46.99,122.54
S$179
  Bottom 0.3: 15.91,117 25.3,126.39 33.48,126.39 | 34.74,126.39 33.48,126.39 | 33.48,126.39 24.09,117 16.38,117 16.38,117.21 25.29,126.12 33.06,126.12 32.5,125.56 32.5,125.49
S$180
  Bottom 1: 64.75,70.88 64.75,74.75 62,77.5 | 62,77.5 57.38,82.12 56.38,82.12 | 64.62,72.88 62,75.5 62,76.5 | 62,77.5 62,76.5 | 62,76.5 64,74.5 64,74.38
S$181  (via drill 0.6 pad 1.5)
  other vias: 120.89,116.08
S$182  (via drill 0.6 pad 1.5)
  other vias: 123.3,116.11
S$183
  Bottom 0.3: 71.25,73.5 85.12,87.38 85.12,140 87,141.88 93,141.88 93.12,141.75 96,138.88 96,136.25
  Bottom 0.8: 96,136.12 96.12,136.25 96.12,138.75 93.12,141.75 87.25,141.75 85.38,139.88 85.38,137.88
S$184
  Bottom 0.3: 75.5,80.12 72.88,77.5 | 72.88,77.5 73,77.5 | 73,77.5 75.5,80 | 73.12,77.5 83.67,88.05 83.67,141.3 86.38,144 95.62,144 98,141.62 98.75,140.88 98.75,136.25 | 73.12,77.5 73,77.5 | 72.88,77.5 69.75,77.5 68.5,76.25 | 75.75,80.38 75.5,80.12 | 75.5,80.12 75.5,79.38 73.62,77.5 73.38,77.5 | 73.12,77.5 73.38,77.5 | 73.38,77.5 75,79.12
  Bottom 0.8: 98.5,136.12 98.5,141.12 98,141.62 95.75,143.88 86.62,143.88 83.7,140.95 83.7,87.95 75.25,79.5
S$185
  Bottom 0.3: 75.38,76.88 75.12,76.62 75.12,76.5 72.12,73.5 71.38,73.5 73.75,75.88 73.88,75.88 74,75.75 71.88,73.62
S$186
  Bottom 0.3: 81.75,109 81.75,108.12 77.88,104.25 77.75,104.25 | 97,145.75 97.75,145.75 101.25,142.25 101.25,136 | 85.88,145.5 81.25,140.88 81.25,109.25 | 81.25,109.25 81.25,107.75 77.75,104.25 | 77.75,104.25 71.5,104.25 71.25,104 | 81.25,109.25 80.75,108.75 | 76.38,104.38 80.75,108.75 | 80.75,108.75 81,108.75 81,107.88 77.62,104.5 76.62,104.5 80.75,108.62 80.88,108.62 80.88,108.25 77.5,104.88 | 77.5,104.88 77.25,104.62 77,104.62 80.75,108.38 80.75,108 77.62,104.88 77.5,104.88
  Bottom 0.8: 101.25,136 101.25,141.88 97.38,145.75 97,145.75 86.12,145.75 85.88,145.5 81.5,141.12 81.5,108.38
S$187
  Bottom 0.3: 77.75,104.88 77.62,104.88 77.5,104.75
S$188
  Bottom 0.3: 71.25,104.12 71.5,104.38 77,104.38
S$189
  Bottom 0.3: 74.25,111.75 74.25,109.38 72.88,108 | 68.5,106.5 70,108 72.88,108 | 72.88,108 73.25,108 74.5,109.25 | 74.5,109.25 74.5,111.5 74.5,144.5 82.25,152.25 | 81.75,152 101.88,152 103,152 109,146 109,136.25 | 74.75,111.5 74.75,109.5 74.5,109.25
  Bottom 0.5: 101.12,152.38 108.88,144.62 108.88,145.12 102,152 101.88,152
  Bottom 0.8: 108.88,136.38 108.88,144.62 108.88,146 102.5,152.38 101.12,152.38 82.38,152.38 | 82.38,152.38 82.12,152.38 81.75,152 74.5,144.75 74.5,111.5 | 82.25,152.25 82.38,152.38
S$190
  Top 0.3: 65.08,146.26 82.44,146.26 87.01,141.69 118.7,141.69 120.86,139.53 120.86,117.59 120.88,117.58
S$191  (via drill 0.6 pad 1.5)
  other vias: 120.89,117.58
S$192
  Top 0.3: 123.29,117.55 123.29,118.51 121.75,120.05 121.75,139.89 119.22,142.41 87.54,142.41 82.8,147.15 67.53,147.15 65.84,148.84 65.01,148.84
S$193
  Bottom 0.5: 96.38,145.62 101.12,140.88 | 101.12,140.88 101.12,140.38 | 101.12,140.88 101.12,141.5 97,145.62 96.88,145.62 | 95.88,145.62 96.88,145.62 | 96.88,145.62 101.38,141.12 101.38,139.75
S$194
  Bottom 0.5: 92.62,143.75 93.75,143.75 98.38,139.12 | 98.38,139.12 98.38,138.75 | 98.38,139.12 98.38,139.75 94.5,143.62 | 94.5,143.62 94.25,143.62 | 94.5,143.62 95.12,143.62 98.12,140.62 98.12,140.5
S$195
  Bottom 0.3: 68.75,104 70,105.25 74.25,105.25 | 74.25,105.25 78.5,109.5 | 78.75,109.75 79,110 | 79,110 79,111.12 | 79,111.12 79,141.38 85.88,148.25 99.25,148.25 103.75,143.75 103.75,142.25 103.75,141.38 103.75,136.25 | 74.25,105.25 74.62,105.25 | 74.62,105.25 74.75,105.25 79,109.5 79,110 | 79,111.12 78.5,111.12 78.5,109.5 | 78.5,109.5 78.75,109.75 | 78.75,109.75 78.75,110.88 | 78.75,109.75 78.75,109.38 77.88,108.5 74.62,105.25
  Bottom 0.5: 79.5,112 79.5,111.5 79.62,111.38 79.62,110.25 77.88,108.5 | 97.12,148.12 103.75,141.5 | 103.75,141.5 103.75,141.38 | 103.75,141.5 103.75,141.88 97.88,147.75 98.5,147.75 103.75,142.5 | 103.75,142.5 103.75,142.25 | 103.75,142.5 103.75,143.12 99.38,147.5 99.12,147.5
  Bottom 0.8: 103.88,136.38 103.88,143.75 99.5,148.12 97.12,148.12 85,148.12 78.75,141.88 78.75,111.12
S$196
  Bottom 1: 16.65,117.2 17.01,117.56 24.16,117.56 32.27,125.67 | 32.38,125.78 32.27,125.67 | 32.27,125.67 25.46,125.67 17.82,118.04 | 17.82,118.04 17.75,118.04 | 17.82,118.04 23.45,118.04 30.48,125.06 | 30.51,125.1 30.48,125.06 | 30.48,125.06 25.74,125.06 19.31,118.64 | 19.31,118.64 19,118.64 | 19.31,118.64 22.75,118.64 28.82,124.71 | 28.82,124.71 28.88,124.71 | 28.82,124.71 26.29,124.71 20.95,119.38 20.95,119.33 22.36,119.33 27.24,124.2 | 27.24,124.2 27.41,124.2 | 27.24,124.2 26.64,124.2 22.41,119.97 22.24,119.97 21.68,119.41 21.55,119.41
S$197
  Bottom 0.5: 63.7,113.66 65.47,113.66 69.25,117.44 69.25,120.08 69.39,120.21 69.74,119.86 69.74,117.95 67.84,116.05 66.35,114.56 | 66.35,114.56 65.54,113.75 64.29,113.75 64.79,113.25 65.47,113.25 66.35,114.12 66.35,114.56
S$198
  Bottom 1: 57.94,141.14 53.75,141.14 | 53.75,141.14 53.73,141.16 | 53.75,141.14 68.95,125.94 68.95,117.53 68.96,117.51 69.5,118.05 69.5,126.45 | 57.88,141.12 60.38,141.12 69.5,132 69.5,126.45 | 69.5,126.45 55.41,140.54 59.85,140.54 68.53,131.86 68.53,128.84 | 68.53,128.84 68.83,128.54 | 68.53,128.84 57.55,139.81 | 57.55,139.81 56.73,139.81 | 57.55,139.81 59.31,139.81 67.59,131.54 67.8,131.54 68.78,130.56 68.78,129.94 | 68.78,127.71 68.78,129.94 | 68.78,129.94 59.52,139.19 58.9,139.19
S$199
  Bottom 1: 60.44,146.22 60.46,146.2 62.96,146.2
S$200
  Bottom 1: 57.83,148.76 54.2,148.76 54.12,148.69
S$201
  Bottom 1: 57.75,146.26 54.27,146.26 54.23,146.31
S$202  (via drill 0.6 pad 1.5)
  other vias: 63.5,148.84
S$203  (via drill 0.6 pad 1.5)
  other vias: 65.01,148.85
S$204  (via drill 0.6 pad 1.5)
  other vias: 63.5,146.28
S$205  (via drill 0.6 pad 1.5)
  other vias: 65.01,146.28
S$206  (via drill 0.6 pad 1.5)
  other vias: 123.3,117.58
S$207
  Bottom 0.3: 16.75,149.25 16.75,149.38
  Bottom 1: 16.75,149.38 16.75,126.12 16,125.38
S$208
  Bottom 1: 118.34,152.39 118.34,149.59 116.39,147.64 116.39,136.04
S$209
  Bottom 0.813: 144.43,127.94 136.53,127.94 136.1,127.51
S$210
  Bottom 0.813: 144.79,122.21 144.79,124.34 143.26,125.86 139.79,125.86 138.75,124.83 138.75,124.24
S$211
  Bottom 0.813: 117.26,111.46 117.26,101.74 117.38,101.62
S$212
  Bottom 0.813: 108.54,113.59 110.69,111.44 111.99,111.44 113.19,111.44 | 113.19,111.44 114.06,112.31 | 117.22,111.35 117.14,111.44 113.19,111.44
S$213
  Bottom 0.813: 114.97,113.24 116.76,111.45 | 116.76,111.45 117.36,111.45 | 116.76,111.45 116.08,111.45 115.08,112.45 114.76,112.45 113.83,111.51 | 113.83,111.51 113.53,111.51 | 113.83,111.51 114.62,111.51 114.92,111.81
S$214
  Bottom 0.3: 117.25,111.5 117.25,109.24 117.25,101.5
  Bottom 0.813: 114.39,111.53 115.51,111.53 117.25,109.79 | 117.25,109.79 117.25,109.24 | 117.25,109.79 117.25,110.42 116.72,110.95
S$215
  Bottom 0.3: 98.39,116.01 99.3,116.92 99.3,118.3 98.51,119.09 93.71,119.09 92.5,117.88 | 87.5,119.12 88.75,117.88 92.5,117.88 | 92.5,117.88 96.5,117.88 98.38,116
S$216
  Bottom 0.3: 106.08,113.49 105.25,112.66 105.25,110.86 102.14,107.75 | 87.62,109 88.88,107.75 101,107.75 102.14,107.75 | 102.14,107.75 103,107.75 106.12,110.88 106.12,113.62
S$217
  Bottom 0.3: 111,116 110.12,116.88 110.12,121.72 | 87.65,126.74 88.89,125.5 106.35,125.5 109.47,122.38 110.12,121.72 | 110.12,121.72 111.1,120.75 111.1,115.97
S$218
  Bottom 0.5: 103.15,122.8 104.94,121.01 104.94,117.24 105.84,116.34 105.84,121.16 104.25,122.75 103.84,122.75 | 103.69,122.75 103.84,122.75 | 103.84,122.75 105.39,121.2 105.39,117.28 105.47,117.19
S$219
  Bottom 0.5: 101.03,121.66 102,121.66 103.17,120.49 103.17,116.66 | 103.17,116.66 103.24,116.6 | 103.17,116.66 102.79,117.05 102.79,120.21 101.66,121.34 101.39,121.34
S$220
  Bottom 0.5: 93,118.03 93.75,118.78 98.29,118.78 98.9,118.16 98.9,117.35 99.03,117.22 99.03,117.03 98.33,116.33 96.46,118.19 93.42,118.19 | 93.42,118.19 93.36,118.12 | 93.42,118.19 93.74,118.5 97.89,118.5 98.55,117.84 98.55,117.04 98.29,117.04 98.12,116.88 96.81,118.19 96.81,118.28 97.58,118.28 98.11,117.74 98.11,117.35 98.1,117.35 97.49,117.96
S$221
  Bottom 0.5: 110.26,121.35 110.74,120.88 110.74,116.4 110.44,116.7 110.44,121.09 110.47,121.12
S$222
  Bottom 0.5: 98.15,110.42 100.76,113.04 | 100.76,113.04 100.76,113.12 | 100.76,113.04 100.76,112.39 98.86,110.49 98.59,110.49
S$223
  Bottom 0.5: 105.95,113.17 105.53,112.75 105.53,110.89 102.61,107.97 | 102.61,107.97 102.6,107.97 | 102.61,107.97 103,107.97 105.92,110.9 105.92,112.78
S$224
  Bottom 0.5: 91.41,115.19 93.76,115.19 95.24,113.71 | 95.24,113.71 95.41,113.71 | 95.24,113.71 93.05,113.71 91.95,114.81 | 91.95,114.81 91.78,114.81 | 91.95,114.81 93.84,114.81 94.46,114.19 94.46,113.99 93.04,113.99 92.69,114.34 92.69,114.45 93.66,114.45 93.81,114.3
S$225
  Top 1: 139.57,104.2 139.57,110.21 141.49,112.12 146.57,112.12 147.62,113.17 147.62,136.25 145.66,138.21 141.79,138.21 140.61,139.39
S$226  (via drill 0.6 pad 1.5)
  other vias: 139.44,103.72
S$227
  Bottom 0.3: 18.88,59.88 22.88,59.88 28.88,65.88 28.75,65.88 28.75,65.75 31.75,68.75 | E$29.OUT- 48.75,71.88 45.62,68.75 32,68.75 31.75,68.75 | 31.75,68.75 30.62,69.88 30.62,71 30.62,71.12
  Bottom 1: E$29.OUT- 48.75,71.75 45.75,68.75 32,68.75 31.5,68.75 | 31.5,68.75 31.38,68.75 30.62,68 | 30.62,71 30.62,69.62 | 30.62,69.62 31.5,68.75 | 30.62,68 30.62,69.62 | 30.62,68 22.62,60 18.62,60
S$228
  Bottom 1.5: 18.48,59.83 16.99,59.83 14.5,57.34 14.5,50.64 16.76,48.38 18.27,48.38
S$229
  Top 1: 114.95,106.54 114.95,97.53 116.15,96.33 121.95,96.33 123.83,94.45 123.83,89.08 122.03,87.28 74.78,63.79 53.58,63.79 51.46,65.9
S$230  (via drill 0.6 pad 1.5)
  other vias: 51.42,65.72
S$231  (via drill 0.6 pad 1.5)
  other vias: 51.42,67.22
S$232
  Bottom 1.5: 18.59,48.26 34.34,64.01 49.76,64.01 51.42,65.67 51.42,67
S$233  (via drill 0.6 pad 1.5)
  other vias: 114.91,106.14
S$234  (via drill 0.6 pad 1.5)
  other vias: 114.91,107.61
S$235
  Bottom 1: 117.29,108.71 115.34,106.76 114.95,106.76 | 114.92,106.76 114.95,106.76 | 114.95,106.76 116.81,104.9 | 117.29,104.42 116.81,104.9 | 116.81,104.9 116.81,107.15 | 116.81,107.31 116.81,107.15 | 116.81,107.15 116.14,106.47
S$236
  Bottom 1: 16.4,59.88 18.7,59.88
S$237
  Bottom 1: 15.79,81.1 14.84,81.1
S$238  (via drill 0.6 pad 1.5)
  other vias: 48.74,67.17
S$239  (via drill 0.6 pad 1.5)
  other vias: 47.26,67.17
S$240  (via drill 0.6 pad 1.5)
  other vias: 18.81,78.92
S$241  (via drill 0.6 pad 1.5)
  other vias: 20.31,78.91
S$242
  Top 1.5: 20.31,78.88 22.29,76.9 22.29,66.75 25.91,63.12 43.86,63.12 47.96,67.22
S$243
  Bottom 1.5: 15.82,81.09 17.98,78.94 19.19,78.94
S$244  (via drill 0.6 pad 1.5)
  other vias: 138.19,140.82
S$245  (via drill 0.6 pad 1.5)
  other vias: 138.19,139.35
S$246
  Top 1: 138.26,140.21 138.26,137.21 135.99,134.94 135.91,135.01 133.4,135.01 133.4,131.2 130.99,128.79 130.99,100.24 129.44,98.69 121.74,98.69 120.21,100.21 120.21,110.95 115.19,115.97
S$247  (via drill 0.6 pad 1.5)
  other vias: 114.83,116.17
S$248  (via drill 0.6 pad 1.5)
  other vias: 114.83,117.66
S$249
  Bottom 1: 138.25,140.46 138.25,137.16 136.03,134.94
S$250
  Bottom 0.3: 106,136 106,145.38 101.12,150.25
S$251
  Top 1: 123.99,98.7 124.85,98.7 126.24,97.31 | 127.08,98.64 126.24,97.8 126.24,97.31 | 46.75,65.88 50.83,61.8 75.16,61.8 123.78,86.21 126.24,88.66 126.24,96.91 126.24,97.31
S$252
  Bottom 1.5: 87.55,98.76 87.61,98.83 90.05,98.83
S$253  (via drill 0.6 pad 1.5)
  other vias: 123.54,152.44
S$254  (via drill 0.6 pad 1.5)
  other vias: 120.99,152.41
S$255  (via drill 0.6 pad 1.5)
  other vias: 118.35,152.38
S$256
  Bottom 1: 113.6,111.71 118.75,116.86 118.75,145.91 123.59,150.75 123.59,152.4
S$257
  Bottom 1.5: 57.84,143.8 67.31,143.8 80.05,156.54 113.56,156.54 114.72,157.7 121.33,157.7 123.56,155.46 123.56,152.39 123.55,152.38
S$258
  Bottom 0.813: 146.07,143.4 146.06,143.4 | 144.49,143.4 146.06,143.4 | 146.06,143.4 147.47,141.99 147.47,137.8 145.19,135.51 144.47,135.51
S$259
  Bottom 1: 123.34,151.99 123.34,151.29 128.19,146.44 128.19,139.35 130.24,139.35 141.55,150.66 146.09,150.66 147.51,149.24 147.51,144.55 146.26,143.3 144.47,143.3
S$260
  Bottom 0.3: 80.92,100.95 81.92,99.95 81.92,88.55 80.96,87.59 80.96,100.79
  Bottom 1: 80.96,100.79 81.39,100.36 81.39,88.44 81.29,88.34
TOP
  pour Top: 10.39,160.43 150.43,160.43 150.43,155.01 150.43,99.79 150.4,99.79 140.4,89.79 140.34,89.79 20.15,29.6 9.59,29.6 9.59,32.35 9.59,160.43

## Text on the board
tPlace: LCD ADJ | Pengkabelan ditata yang rapi boskuuuu..... | ST-LINK | CLK | IO | GND | VCC | TO ARDUINO | TEAM ROBOT UNV.TRUNOJOYO MADURA | TO LCD MONITOR | Kontes Robot Indonesia 2022 | MULTIPIN CONNECTOR | VCC | GND | DATA | 10Kohm | 10Kohm | 10Kohm | 10Kohm | TO ENCODER MAPPING | 100n | TO KEYPAD | LED | 100n | USART3 | 68ohm | 100n | 100n | TX | RX | 68ohm | GND | DRIVER MOTOR | 10Kohm | 10Kohm | 1k | 10k | GND | TX | RX | USART1 | Board Shield of STM32 Robo Soccer Created by : @analuamynad | IN 5V | SAKERA | IN 12V